# Altium PCB n555_pcb2.PcbDoc
Units mil, origin at the board's own origin, x right, y up, seen from the top; angles counter-clockwise.
Board outline 3500 x 2000 mil, 2 copper layers (Top Layer, Bottom Layer), stack 61.756 mil thick; 27 components, 15 nets, 70 pads, 11 vias.
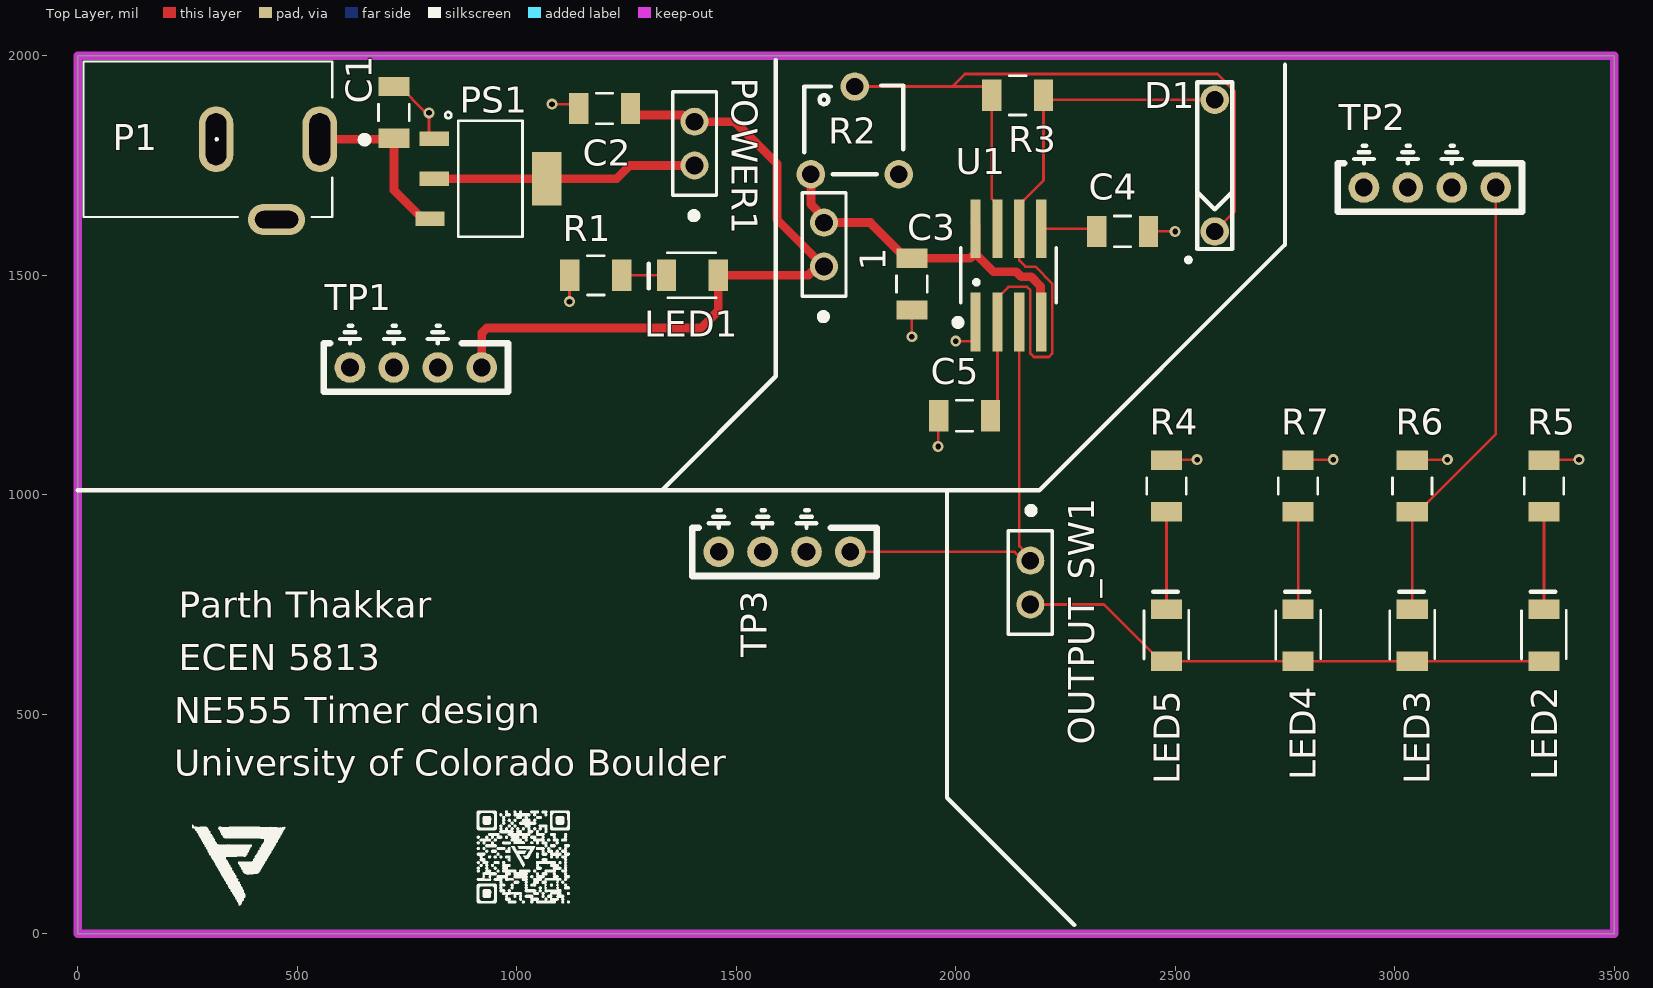
[diagram p0: Top Layer view]
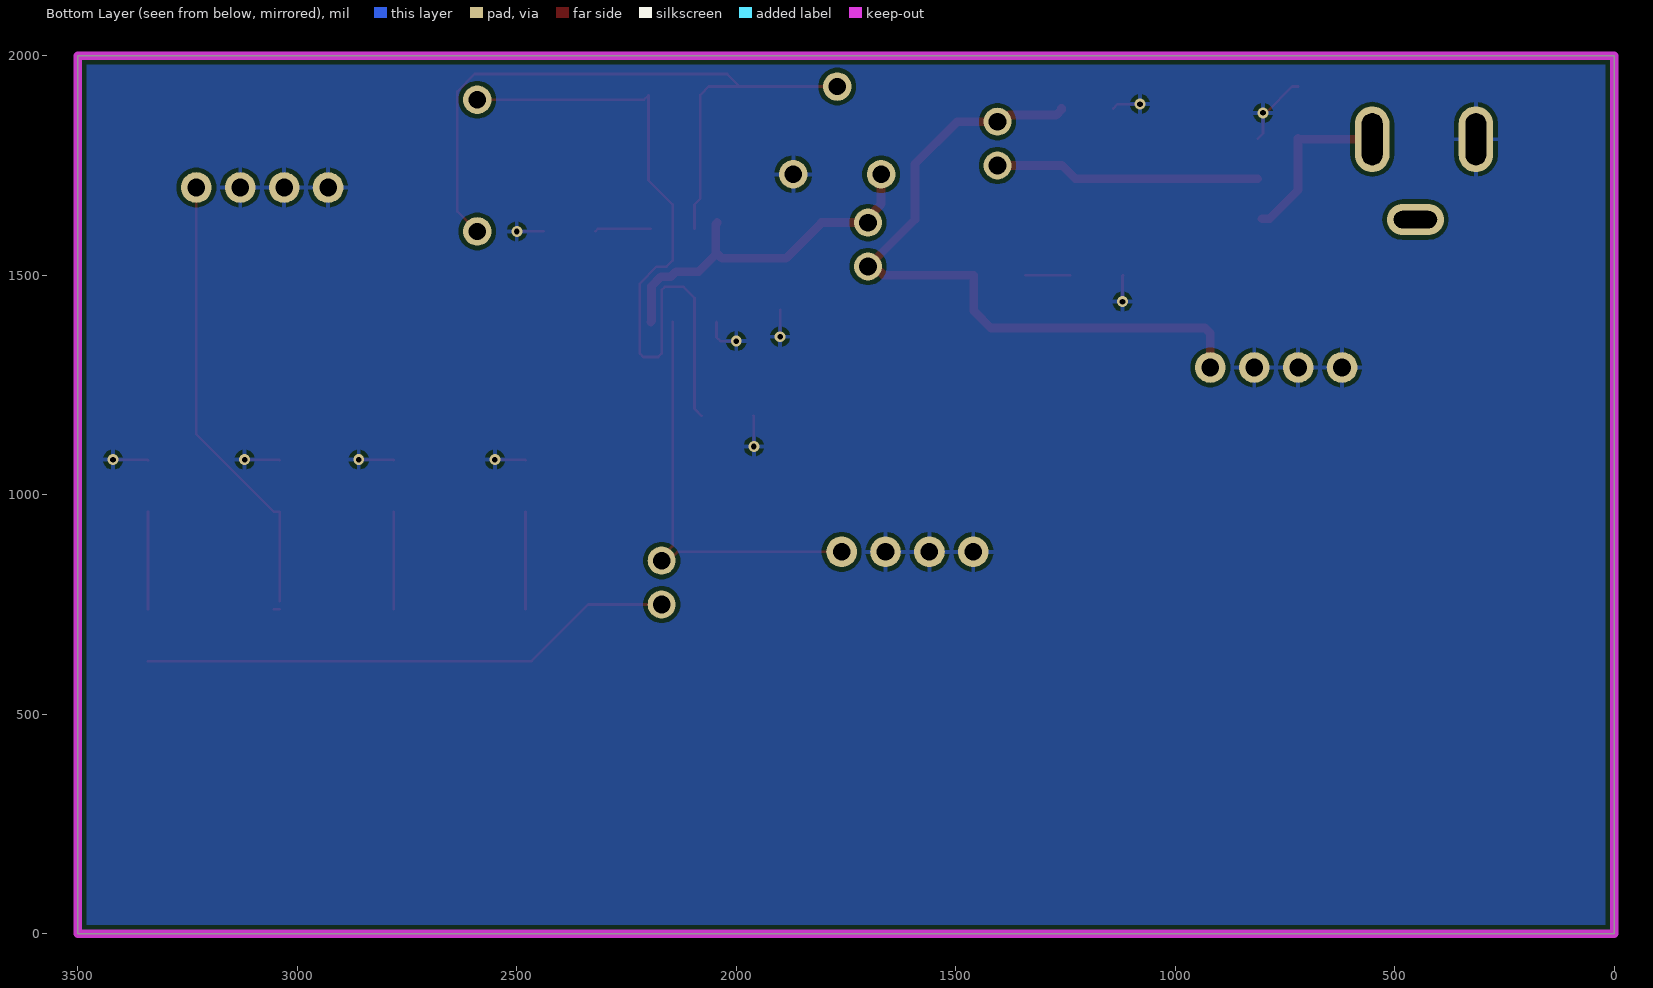
[diagram p1: Bottom Layer view, seen from below]
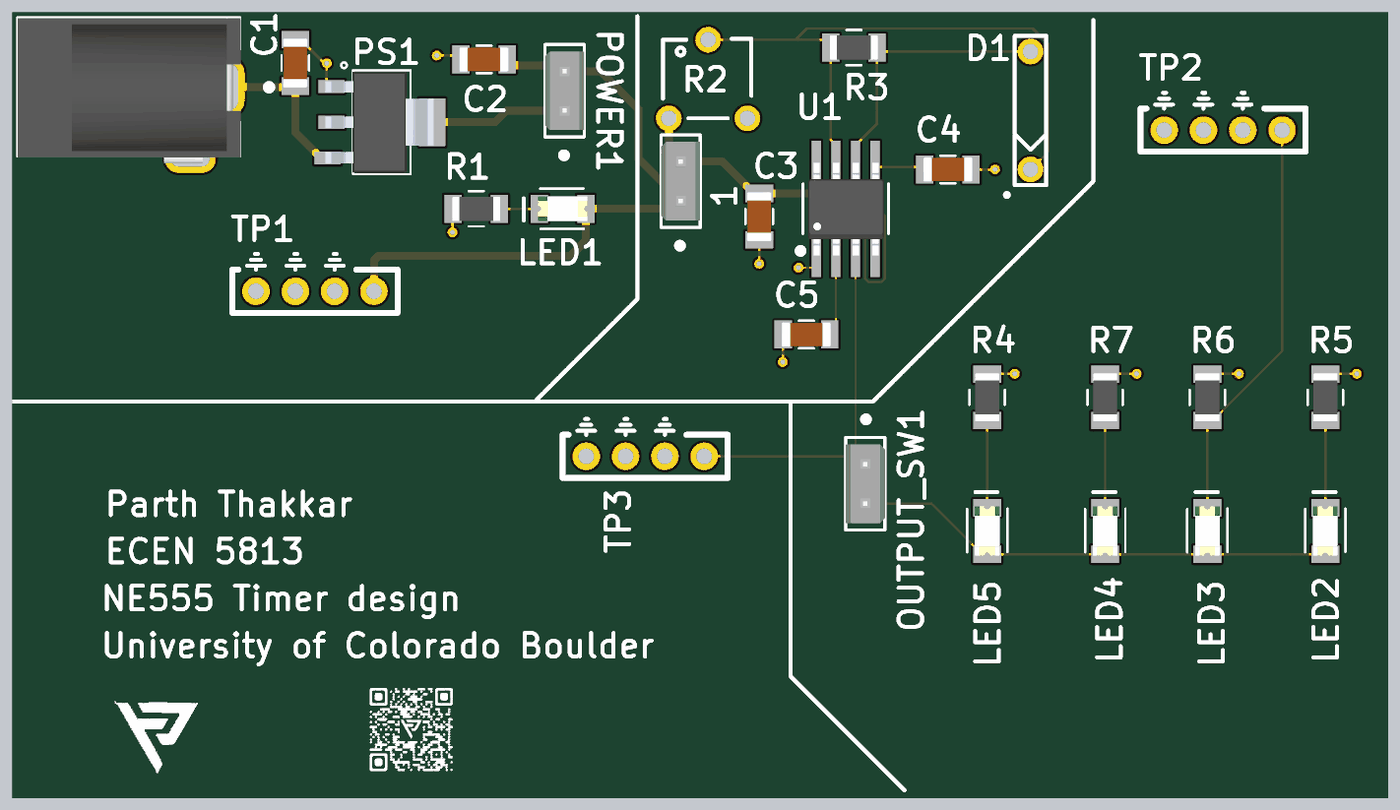
[diagram p2: 3D render of the assembled board from above, using the file's embedded part models]

## Layer stack, top to bottom
Top Solder: solder mask 1, SM-001, Dk 4
Top Layer: signal copper 1.378
Dielectric 1: core 59, Core-043, Dk 4.3
Bottom Layer: signal copper 1.378
Bottom Solder: solder mask 1, SM-001, Dk 4

## Board outline
0,0 3500,0 3500,2000 0,2000

## Design rules (kind name [scope] priority, off if disabled: settings)
Clearance [All] p1: gap=10 ignorepadtopadclearanceinfootprint=FALSE ismatrix=TRUE
HoleSize [All] p1: absolutevalues=TRUE maxlimit=130 minlimit=1 maxpercent=80.000 minpercent=20.000
PolygonConnect [All] p1: connectstyle=Relief reliefconductorwidth=10 reliefentries=4 polygonreliefangle="90 Angle" airgapwidth=10
RoutingVias [All] p1: holewidth=13 width=25 viastyle="Through Hole" minholewidth=13 minwidth=25 maxholewidth=13 maxwidth=25
SilkToSolderMaskClearance [IsPad] p1: minsilkscreentomaskgap=2 clearancetoexposedcopper=TRUE
SolderMaskExpansion [All] p1: expansion=6 istentingtop=FALSE
UnRoutedNet [All] p1: checkbadconnections=TRUE
Width 5v_width [InNet('555_5v')] p1: maxlimit=100 minlimit=10 preferedwidth=20 minimp=50.000000 maximp=50.000000 favimp=50.000000
Width 5v_width2 [InNet('+5')] p2: maxlimit=100 minlimit=10 preferedwidth=20 minimp=50.000000 maximp=50.000000 favimp=50.000000
Width [All] p3: maxlimit=20 minlimit=6 preferedwidth=6 minimp=50.000000 maximp=50.000000 favimp=50.000000
27 further rules are at their usual default settings.

## Components (designator, comment, footprint, x,y, rotation, side; value= is the part's Value field where it differs from the comment)
1 "SW_2Pin_100mil_Switch" 2Pin-Header-Conn 1700,1520 r90 top
C1 "10uF" 1206_Passive_Capacitor 720,1871 r90 top
C2 "22uF" 1206_Passive_Capacitor 1200,1880 r0 top
C3 "22uF" 1206_Passive_Capacitor 1900,1480 r90 top
C4 "1uF" 1206_Passive_Capacitor 2380,1600 r180 top
C5 "0.1uF" 1206_Passive_Capacitor 2020,1180 r0 top
D1 "diode" "Through hole diode" 2590,1600 r90 top
LED1 "Blue" LED_1206 1400,1500 r180 top
LED2 "Blue" LED_1206 3340,680 r90 top
LED3 "Blue" LED_1206 3040,680 r90 top
LED4 "Blue" LED_1206 2780,680 r90 top
LED5 "Blue" LED_1206 2480,680 r90 top
OUTPUT_SW1 "SW_2Pin_100mil_Switch" 2Pin-Header-Conn 2170,850 r270 top
P1 "Power Jack" Power_Jack 551.22,1810 r180 top value="CONN PWR JACK 2X5.5MM SOLDER"
POWER1 "SW_2Pin_100mil_Switch" 2Pin-Header-Conn 1405,1750 r90 top
PS1 "AMS1117-5.0" LDO 940,1720 r270 top value="IC REG LINEAR 5V 1A SOT223"
R1 "1KOhm" 1206_Passive_Resitor 1180,1500 r0 top
R2 "Pot" potentiometer 1670,1730 r0 top
R3 "4.7KOhm" 1206_Passive_Resitor 2141,1910 r180 top value=15KOhm
R4 "50Ohm" 1206_Passive_Resitor 2480,1020 r270 top
R5 "10KOhm" 1206_Passive_Resitor 3340,1020 r270 top
R6 "1KOhm" 1206_Passive_Resitor 3040,1020 r270 top
R7 "300Ohm" 1206_Passive_Resitor 2780,1020 r270 top
TP1 "10x Probe TP" TP10x_Probe 770,1290 r180 top
TP2 "LED Test probe" TP10x_Probe 3080,1700 r180 top
TP3 "10x Probe TP" TP10x_Probe 1610,870 r180 top
U1 "NE555DR" TS555IDTTR 2120,1500 r90 top

## Footprints (in the part's own frame and the unit in brackets; to place one, negate y for a bottom-side part, rotate by r counter-clockwise, add the part's x,y. Pads: shape width x height; smd on the part's side, far side on the other; paste and mask are expansions set on the pad)
2Pin-Header-Conn [mm]
  round 1.62 hole 1.02: 1(0,0) 2(2.54,0)
  silkscreen extent -3.03,-1.27 4.26,1.26, body extent -1.27,-1.27 3.81,1.27, height 8.13
1206_Passive_Capacitor [mil]
  rect 44x71 smd: 1(-59,0) 2(59,0)
  silkscreen extent -19,-35 19,35, body extent -63,-31 63,32, height 50
1206_Passive_Resitor [mil]
  rect 44x71 smd: 1(-59,0) 2(59,0)
  silkscreen extent -19,-45 19,45, body extent -61,-31 61,31, height 26
LDO [mm]
  rect 0.838x1.7 smd: 1(-2.311,-3.25) 2(0,-3.25) 3(2.311,-3.5)
  rect 3.099x1.7 smd: 4(0,3.25)
  silkscreen extent -3.86,-2.62 3.35,1.85, body extent -3.25,-3.65 3.25,3.35, height 1.85
LED_1206 [mil]
  rect 44x71 smd: 1(-59,0) 2(59,0)
  silkscreen extent -54,-51 99,51, body extent -63,-31 63,31, height 28
potentiometer [mil] "3 pin potentiometer , Through hole component"
  round 65 hole 39.37 mask+6: 1(200,0) 2(0,0) 3(100,200)
  silkscreen extent -15,0 210,202
Power_Jack [mm]
  oval 2x3.8 hole 1.2 slot 3 at 90 deg: 1(0,0) 2(6,0)
  oval 3.3x1.8 hole 1 slot 2.5 at 0 deg: 3(2.5,4.65)
  silkscreen extent -2.79,-4.5 13.68,4.5, body extent -0.76,-4.45 13.64,4.95, height 11.49
"Through hole diode" [mil]
  round 65 hole 39.37: 1(0,0) 2(300,0)
  silkscreen extent -70,-40 340,65
TP10x_Probe [mil] "Small Probs footprint"
  round 70 hole 40: 1(-150,0) 2(-50,0) 2(50,0) 2(150,0)
  silkscreen extent -210,-95 210,55
TS555IDTTR [mm] "IC OSC Single Timer 2.7MHz 8SOIC"
  rect 3.4x0.6 smd: 1(-2.7,1.905) 2(-2.7,0.635) 3(-2.7,-0.635) 4(-2.7,-1.905) 5(2.7,-1.905) 6(2.7,-0.635) 7(2.7,0.635) 8(2.7,1.905)
  silkscreen extent -2.85,-2.77 1.6,3.05, body extent -3.03,-2.48 2.96,2.43, height 1.75

## Part data
1 OUTPUT_SW1 POWER1: "2Pin Header", LCSC Part#=C124375, Type=Extended
C1 C2 C3 C4 C5: library part C_1uF_1206, "MULTILAYER CERAMIC CAPACITORS MLCC - SMD/SMT 1UF 50V 1206 ROHS", LCSC Part#=C1848, MFR Part #=CL31B105KBHNNNE, Digikey Link=https://www.digikey.com/product-detail/en/C1206C105M4RACTU/399-8150-1-ND/3471873/?itemSeq=304982366, Type=Basic
LED1 LED2 LED3 LED4 LED5: library part LED_BLUE_1206, "blue 1206  Light Emitting Diodes (LED) ROHS", LCSC Part#=C130717, MFR Part #=NCD1206B1, Datasheet=https://datasheet.lcsc.com/lcsc/2008201033_Foshan-NationStar-Optoelectronics-NCD1206B1_C130717.pdf, Type=Extended
P1: library part "P_Power Jack", "Power Barrel Connector Jack 2.10mm ID (0.083\"), 5.50mm OD (0.217\") Through Hole, Right Angle", LCSC Part#=C136744, MFR Part #=PJ-102A, Digikey Link=https://www.digikey.com/product-detail/en/PJ-102A/CP-102A-ND/275425/?itemSeq=304982367, Type=Extended
PS1: library part PS_AMS_LDO_5V, "LOW DROPOUT REGULATORS(LDO) POSITIVE FIXED 1.3V @ 1A 15V 5V 1A SOT-223 ROHS", LCSC Part#=C6187, MFR Part #=AMS1117-5.0, Type=Basic
R1 R6: library part R_4.7k_1206, "1kΩ ±1% 0.25W ±100ppm/℃ 1206 Chip Resistor - Surface Mount RoHS", LCSC Part#=C17936, MFR Part #=1206W4F4701T5E, Datasheet=https://datasheet.lcsc.com/lcsc/1810301414_UNI-ROYAL-Uniroyal-Elec-1206W4F4701T5E_C17936.pdf, Type=Basic
R2: library part Potentiometer, "3 pin potentiometer, Through hole component"
R3 R5: library part R_4.7k_1206, "4.7kΩ ±1% 0.25W ±100ppm/℃ 1206 Chip Resistor - Surface Mount RoHS", LCSC Part#=C17936, MFR Part #=1206W4F4701T5E, Datasheet=https://datasheet.lcsc.com/lcsc/1810301414_UNI-ROYAL-Uniroyal-Elec-1206W4F4701T5E_C17936.pdf, Type=Basic
R4: library part R_4.7k_1206, "50Ω ±1% 0.25W ±100ppm/℃ 1206 Chip Resistor - Surface Mount RoHS", LCSC Part#=C17936, MFR Part #=1206W4F4701T5E, Datasheet=https://datasheet.lcsc.com/lcsc/1810301414_UNI-ROYAL-Uniroyal-Elec-1206W4F4701T5E_C17936.pdf, Type=Basic
R7: library part R_4.7k_1206, "300Ω ±1% 0.25W ±100ppm/℃ 1206 Chip Resistor - Surface Mount RoHS", LCSC Part#=C17936, MFR Part #=1206W4F4701T5E, Datasheet=https://datasheet.lcsc.com/lcsc/1810301414_UNI-ROYAL-Uniroyal-Elec-1206W4F4701T5E_C17936.pdf, Type=Basic
TP1 TP2 TP3: library part TP_10x_Probe, "Test Point 300 mil centers"
U1: library part U_555_Slow, "555 Timer SOIC-8_150MIL ROHS 150ns Rise Time", LCSC Part#=C7593, Digikey Link=https://www.digikey.com/product-detail/en/texas-instruments/NE555DR/296-6501-1-ND/372490, MFR Part #=NE555DR, Type=Basic

## Via types
v1: diameter 25, hole 13, Top Layer to Bottom Layer, 11 vias

## Nets (pads, with @x,y where several pads share a name; then routed paths per layer and width w, separated by ;. In a path a pad name is that pad's centre, name@x,y a point inside that pad or via, vN(x,y) a via of type N, cw(c..) or ccw(c..) an arc to the next point about the centre after c; other vN are vias at no path point)
1k_signal: LED3.2 R6.2 TP2.1 | length 1042.1
  Top Layer w6: LED3.2 LED3.2@3053.5,739 ; LED3.2@3040,758 R6.2 3053.5,961 3230,1137.5 TP2.1
555_5v: 1.2 C3.2 R2.2 U1.4 U1.8 | length 838.6
  Top Layer w20: R2.2 1670,1661.85 1700,1631.85 1.2 1805.5,1620 1886.5,1539 C3.2 2032.82,1539 U1.8@2045,1551.18 ; U1.8@2043.19,1620 2046.81,1616.38 2046.81,1547.46 2086.09,1508.19 2137.54,1508.19 2149.1,1496.63 2171.72,1496.63 2193.19,1475.16 2193.19,1395.51 U1.4
+5: POWER1.1 PS1.2 PS1.4 | length 605.4
  Top Layer w20: PS1.2 PS1.4 1227.29,1720 1257.29,1750 POWER1.1
GND: C1.2 C2.1 C3.1 C4.1 C5.1 P1.2 PS1.1 R1.1 R2.1 R4.1 R5.1 R6.1 R7.1 TP1.2 TP2.2 TP3.2 U1.1 | length 882
  Top Layer w6: C1.2 733.5,1930 789.86,1873.64 796.36,1873.64 v1(800,1870) 800,1823.05 PS1.1 ; v1(1080,1890) 1131,1890 C2.1 ; R1.1@1119,1500 1120,1499 v1(1120,1440) ; v1(1900,1360) C3.1 ; v1(1960,1110) 1960,1179 C5.1 ; v1(2000,1350) 2036.19,1350 2045,1358.81 U1.1 ; C4.1 v1(2500,1600) ; R4.1 2481,1080 v1(2550,1080) ; R7.1 2781,1080 v1(2860,1080) ; R6.1 3041,1080 v1(3120,1080) ; R5.1 3341,1080 v1(3420,1080)
Net1_1: 1.1 C2.2 LED1.1 POWER1.2 TP1.1 | length 1634.5
  Top Layer w20: TP1.1 920,1368.28 931.72,1380 1420,1380 1459,1419 LED1.1 1664.36,1500 1684.36,1520 1.1 1592.71,1627.29 1592.71,1753.77 1496.49,1850 1393.15,1850 1378.15,1865 1271,1865 1259,1877 C2.2
NetC1_1: C1.1 P1.1 PS1.3 | length 396.6
  Top Layer w20: P1.1 718,1810 C1.1 720,1694.24 785.24,1629 PS1.3
NetC4_2: C4.2 U1.5 | length 128.6
  Top Layer w6: U1.5 2314.7,1606.3 C4.2
NetC5_2: C5.2 D1.2 R3.1 U1.2 U1.6 | length 1614.2
  Top Layer w6: C5.2 2095,1196 U1.2 2095,1448.82 2119.81,1473.63 2162.2,1473.63 2169.81,1466.01 2169.81,1321.76 2177.8,1313.77 2212.2,1313.77 2219.81,1321.39 2219.81,1481.07 2181.25,1519.63 2158.62,1519.63 2145,1533.25 U1.6 2145,1661.42 2200,1716.42 R3.1 2210,1900 D1.2
NetD1_1: D1.1 R2.3 R3.2 U1.7 | length 1639
  Top Layer w6: R2.3 1992.43,1930 ; U1.7 2095,1661.42 2082,1674.42 R3.2 2082,1911 2063,1930 1992.43,1930 ; D1.1 2635.5,1645.5 2635.5,1918.85 2595.85,1958.5 2020.93,1958.5 1992.43,1930
NetLED1_2: LED1.2 R1.2 | length 102
  Top Layer w6: R1.2 LED1.2
NetLED2_1: LED2.1 LED3.1 LED4.1 LED5.1 OUTPUT_SW1.2 | length 1223.4
  Top Layer w6: OUTPUT_SW1.2 2337.5,750 2466.5,621 LED5.1 LED4.1 LED3.1 LED2.1
NetLED2_2: LED2.2 R5.2 | length 222
  Top Layer w6: LED2.2 R5.2
NetLED4_2: LED4.2 R7.2 | length 222
  Top Layer w6: LED4.2 R7.2
NetLED5_2: LED5.2 R4.2 | length 222
  Top Layer w6: LED5.2 R4.2
NetOUTPUT_SW1_1: OUTPUT_SW1.1 TP3.1 U1.3 | length 972.3
  Top Layer w6: TP3.1 2134.36,870 2154.36,850 OUTPUT_SW1.1 2170,857.83 2145,882.83 U1.3
pads on no net: P1.3

## Polygon pours and split planes (outlines as drawn)
GND on Bottom Layer "GND_L02_P000" (solid, pour order 0): 0,2000 3500,2000 3500,0 0,0

## Keep-outs
Keep-Out Layer:
  the board outline again, w20

## Silkscreen, mask and mechanical layers (free items; w line width, h text height)
Top Overlay:
  drawing of 86 lines, arcs and shapes, not listed
  text "Parth Thakkar" at 230,720 h60
  text "ECEN 5813" at 230,600 h60
  text "NE555 Timer design" at 220,479.99 h60
  text "University of Colorado Boulder" at 220,359.99 h60